# Altium PCB ESP-01S-WS-V1.0.PcbDoc
Units mil, origin at the board's own origin, x right, y up, seen from the top; angles counter-clockwise.
Board outline 1446.9 x 1662.9 mil, 2 copper layers (Top Layer, Bottom Layer); 12 components, 9 nets, 32 pads, 0 vias.
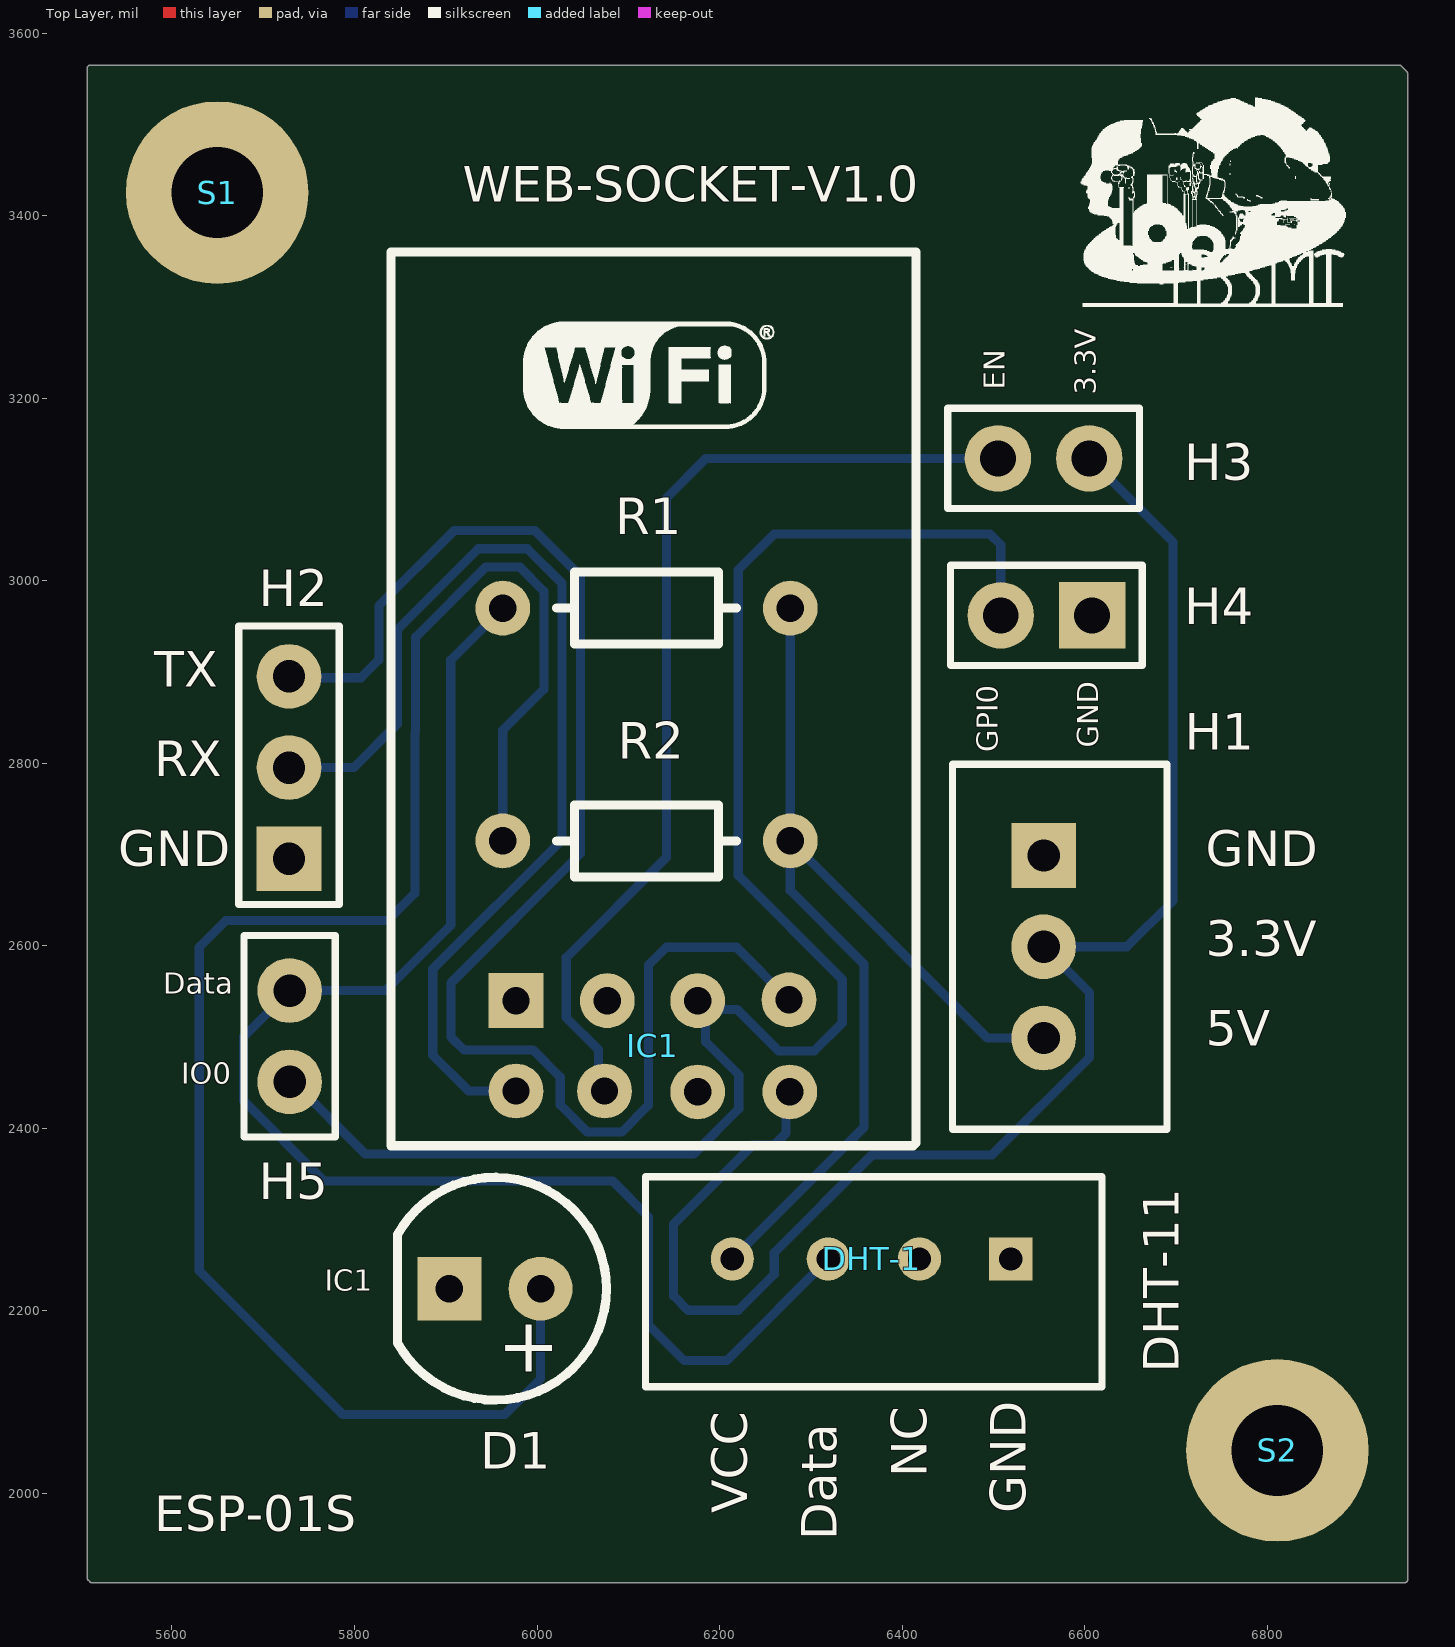
[diagram p0: Top Layer view]
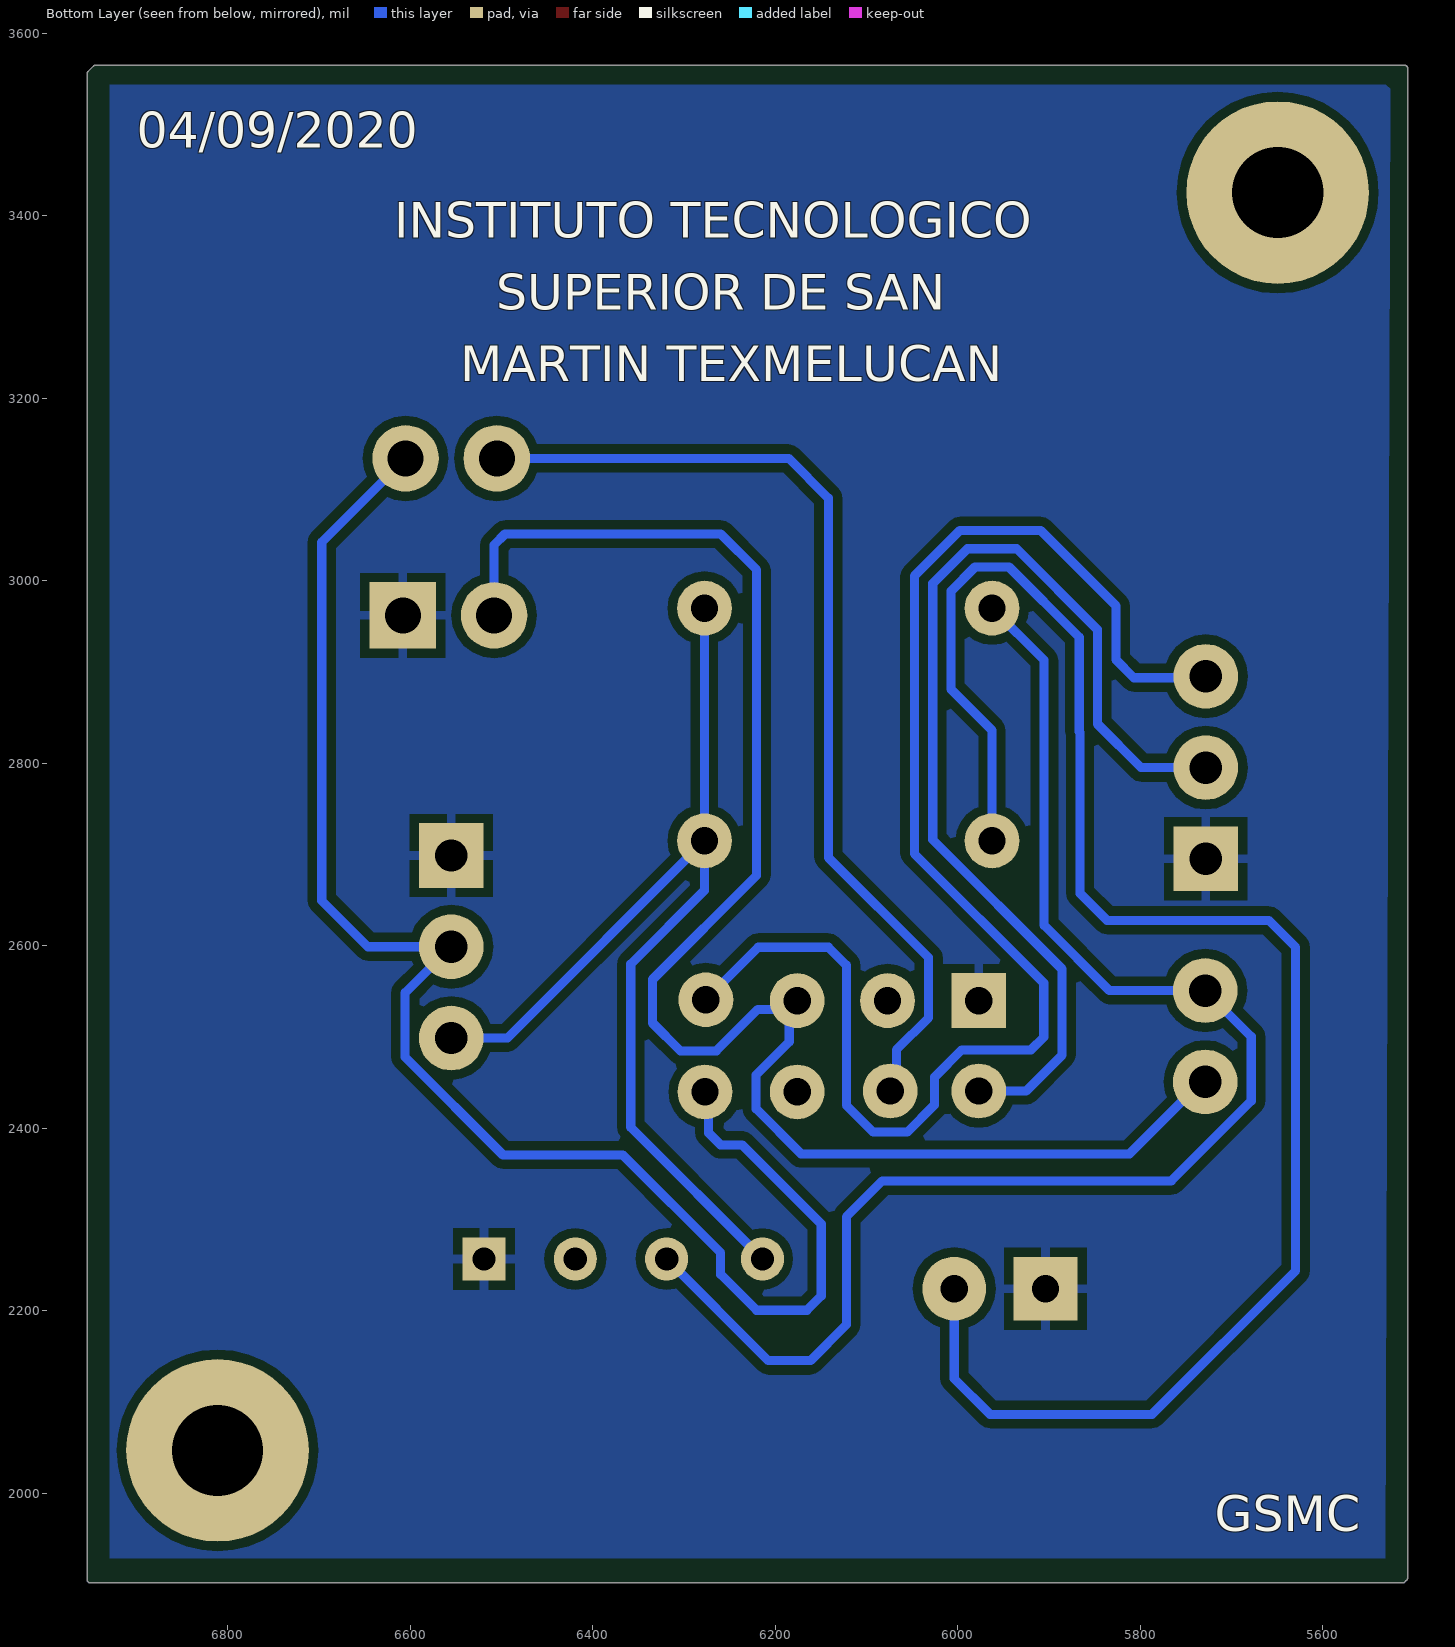
[diagram p1: Bottom Layer view, seen from below]
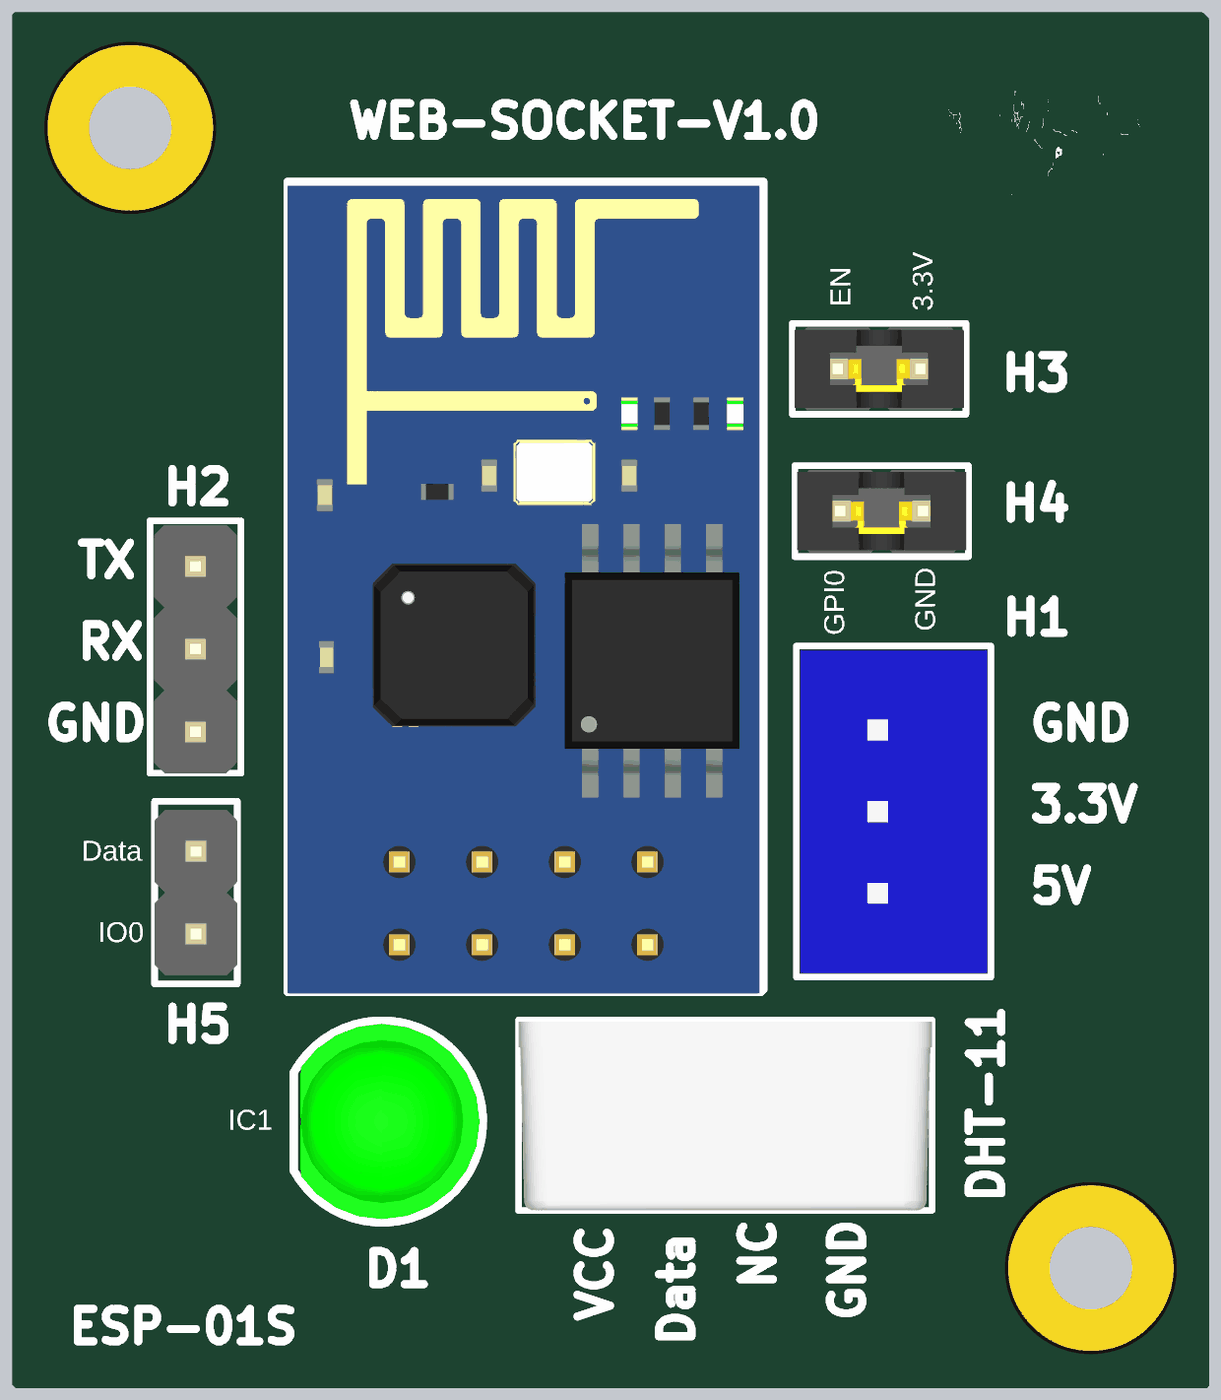
[diagram p2: 3D render of the assembled board from above, using the file's embedded part models]

## Layer stack, top to bottom
Top Solder: solder mask 0.4, Solder Resist, Dk 3.5
Top Layer: signal copper 1.4
Dielectric 1: dielectric 12.6, FR-4, Dk 4.8
Bottom Layer: signal copper 1.4
Bottom Solder: solder mask 0.4, Solder Resist, Dk 3.5

## Board outline
5507.05,1908 ccw(c5511,1908) 5509.39,1904.39 ccw(c5513,1906) 5513,1902.05 6950,1902.05 ccw(c6950,1906) 6953.95,1906 6953.95,3555 ccw(c6950,3555) 6952.79,3557.79 6946.79,3563.79 ccw(c6944,3561) 6944,3564.95 5511,3564.95 ccw(c5511,3561) 5507.05,3561

## Design rules (kind name [scope] priority, off if disabled: settings)
Clearance [All] p1: gap=10 ignorepadtopadclearanceinfootprint=FALSE except(0: Arc-Hole Track-Hole SMDPad-Hole THPad-Hole Via-Hole Fill-Hole Poly-Hole Region-Hole Text-Hole)
PolygonConnect [All] p1: connectstyle=Relief reliefconductorwidth=10 reliefentries=4 polygonreliefangle="90 Angle" airgapwidth=10
RoutingVias [All] p1: holewidth=28 width=50 viastyle="Through Hole" minholewidth=28 minwidth=50 maxholewidth=28 maxwidth=50
SolderMaskExpansion [All] p1: expansion=4 istentingtop=FALSE
Width [All] p1: maxlimit=10 minlimit=10 preferedwidth=10
30 further rules are at their usual default settings.

## Components (designator, comment, footprint, x,y, rotation, side; value= is the part's Value field where it differs from the comment)
D1 "Led_green" Diode_5mm_green 5953.94,2224.41 r180 top
DHT-1 "DHT-11" DHT-11 6214,2257 r0 top
H1 "JST PH" JST-PH-VCC 6555,2699 r270 top
H2 "JST PH" HEADER_PIN_1X3_SERIAL 5728.35,2695.28 r90 top
H3 "EN-VCC" Header_Pin_1X2-EN 6505,3134 r0 top
H4 "GPI0" Header_Pin_1X2-GPI0 6508,2962 r0 top
H5 "Header_Pin_1X2_Data" Header_Pin_1X2_Data 5729,2451 r90 top
IC1 "ESP8266 ESP-01" "ESP8266 ESP-01" 5840,2380 r0 top
R1 "330R" 330R_P8mm_0.25W 6120,2970 r180 top
R2 "330R" 330R_P8mm_0.25W 6120,2715 r180 top
S1 "Sujecion" SUJECION 5649.61,3425.2 r0 top
S2 "Sujecion" SUJECION 6811.02,2047.24 r0 top

## Footprints (in the part's own frame and the unit in brackets; to place one, negate y for a bottom-side part, rotate by r counter-clockwise, add the part's x,y. Pads: shape width x height; smd on the part's side, far side on the other; paste and mask are expansions set on the pad)
330R_P8mm_0.25W [mil]
  round 60 hole 30: 1(-157.48,0) 2(157.48,0)
  silkscreen extent -98,-39 98,39, body extent -167,-50 167,50, height 104
DHT-11 [mm]
  round 1.2 hole 0.65: Data(2.667,0) NC(5.207,0) VCC(0,0)
  rect 1.2x1.2 hole 0.65: GND(7.747,0)
  silkscreen extent -2.41,-3.56 10.29,2.29, body extent -2.41,-3.56 10.29,2.24, height 16.48
Diode_5mm_green [mil]
  rect 70x70 hole 30: 1(50,0)
  round 70 hole 30: 2(-50,0)
  silkscreen extent -122,-122 107,122, body extent -118,-118 98,118, height 361
"ESP8266 ESP-01" [mil] "ESP8266 ESP-01"
  round 60 hole 30: 3.3V(437,60) EN(234,61) IO0(336,160) IO2(237,160) RST(336,60) RX(436,161) TX(137,61)
  rect 60x60 hole 30: GND(137,160)
  silkscreen extent 0,1 575,980, body extent 0,-1 570,975, height 128
Header_Pin_1X2-EN [mm]
  round 1.85 hole 1: 3.3V(2.54,0) EN(0,0)
  silkscreen extent -1.4,-1.4 3.94,1.4, body extent -1.33,-1.27 3.87,1.27, height 8.5
Header_Pin_1X2-GPI0 [mm]
  rect 1.85x1.85 hole 1: GND(2.54,0)
  round 1.85 hole 1: GPI0(0,0)
  silkscreen extent -1.4,-1.4 3.94,1.4, body extent -1.33,-1.27 3.87,1.27, height 8.5
Header_Pin_1X2_Data [mm]
  round 1.8 hole 0.9: Data(2.54,0) IO0(0,0)
  silkscreen extent -1.53,-1.27 4.07,1.27, body extent -1.27,-1.27 3.81,1.27, height 8.51
HEADER_PIN_1X3_SERIAL [mm]
  rect 1.8x1.8 hole 0.9: GND(0,0)
  round 1.8 hole 0.9: RX(2.54,0) TX(5.08,0)
  silkscreen extent -1.27,-1.4 6.48,1.4, body extent -1.27,-1.27 6.35,1.27, height 8.38
JST-PH-VCC [mm]
  round 1.8 hole 0.9: 3.3V(2.54,0) 5V(5.08,0)
  rect 1.8x1.8 hole 0.9: GND(0,0)
  silkscreen extent -2.54,-2.54 7.62,3.43, body extent -2.41,-2.41 7.49,3.34, height 7
SUJECION [mil]
  round 200 hole 100: S(0,0)

## Part data
H1: library part Header_Pin_1X3_VCC
H2: library part Header_Pin_1X3_SERIAL
H3: library part Header_Pin_1X2_EN
H4: library part Header_Pin_1X2_GPI0
R1 R2: library part 330R_0.25W
S1 S2: library part SUJECION

## Nets (pads, with @x,y where several pads share a name; then routed paths per layer and width w, separated by ;. In a path a pad name is that pad's centre, name@x,y a point inside that pad or via, vN(x,y) a via of type N, cw(c..) or ccw(c..) an arc to the next point about the centre after c; other vN are vias at no path point)
GND: D1.1 DHT-1.GND H1.GND H2.GND H4.GND IC1.GND
NetD1_2: D1.2 R2.2 | length 1925.5
  Bottom Layer w10: R2.2 5962.52,2836.08 6007.52,2881.08 6007.52,2988.64 5981.16,3015 5943.88,3015 5867,2938.12 5867,2834.78 5866.14,2833.92 5866.14,2657.48 5836.61,2627.95 5659.45,2627.95 5629.92,2598.43 5629.92,2244.09 5787.4,2086.61 5964.57,2086.61 6003.94,2125.98 D1.2
NetDHT-1_Data: DHT-1.Data H5.Data R1.2 | length 1592.5
  Bottom Layer w10: R1.2 5905.51,2912.99 5905.51,2622.64 5833.88,2551 H5.Data 5678.57,2500.57 5678.57,2430.11 5766.16,2342.52 6082.68,2342.52 6122.05,2303.15 6122.05,2185.04 6161.42,2145.67 6207.67,2145.67 DHT-1.Data
NetDHT-1_VCC: DHT-1.VCC H1.5V R1.1 R2.1 | length 1173.2
  Bottom Layer w10: DHT-1.VCC 6358.27,2401.27 6358.27,2580.03 6277.48,2660.81 R2.1 ; R1.1 R2.1 ; H1.5V 6493.48,2499 R2.1
NetH1_3.3V: H1.3.3V H3.3.3V IC1.3.3V | length 1708.2
  Bottom Layer w10: IC1.3.3V 6272.95,2435.95 6272.95,2395 6259.84,2381.89 6236.22,2381.89 6149.61,2295.28 6149.61,2216.54 6165.35,2200.79 6220.47,2200.79 6259.84,2240.16 6259.84,2263.78 6367.01,2370.94 6498.27,2370.94 6605.43,2478.11 6605.43,2548.57 H1.3.3V 6646.24,2599 6696.85,2649.61 6696.85,3042.15 H3.3.3V
NetH2_RX: H2.RX IC1.TX | length 1157.7
  Bottom Layer w10: H2.RX@5728,2807 H2.RX@5728.09,2807.09 ; H2.RX 5799.21,2795.28 5847,2843.06 5847,2946.4 5935.6,3035 5989.44,3035 6027.52,2996.92 6027.52,2716.36 5885.83,2574.67 5885.83,2480.32 5925.14,2441 IC1.TX
NetH2_TX: H2.TX IC1.RX | length 1634.2
  Bottom Layer w10: H2.TX 5729.92,2893.7 5807.09,2893.7 5826.77,2913.39 5826.77,2972.44 5909.33,3055 5997.73,3055 6047.52,3005.21 6047.52,2701.06 5905.83,2559.37 5905.83,2500 5919.83,2486 5995.64,2486 6025.5,2456.14 6025.5,2425.86 6055.36,2396 6092.64,2396 6122.05,2425.41 6122.05,2578.74 6141.73,2598.43 6218.57,2598.43 IC1.RX
NetH3_EN: H3.EN IC1.EN | length 1109.2
  Bottom Layer w10: IC1.EN 6067.36,2447.64 6067.36,2486 6032,2521.36 6032,2587.12 6141.73,2696.85 6141.73,3090.55 6185.18,3134 H3.EN 6500.92,3129.92 6496.06,3129.92 H3.EN@6496.06,3125.06
NetH4_GPI0: H4.GPI0 H5.IO0 IC1.IO0 | length 1806.6
  Bottom Layer w10: H5.IO0 5733,2451 5812,2372 6171.64,2372 6221,2421.36 6221,2458.64 6184.64,2495 IC1.IO0@6184.64,2531.36 ; IC1.IO0@6176,2527 IC1.IO0 IC1.IO0@6184.64,2531.36 ; H4.GPI0 6508,3039.24 6496.06,3051.18 6259.84,3051.18 6220.47,3011.81 6220.47,2677.17 6334.44,2563.2 6334.44,2515.54 6303.9,2485 6264.53,2485 6219.1,2530.43 6185.57,2530.43 IC1.IO0@6184.64,2531.36
pads on no net: DHT-1.NC IC1.IO2 IC1.RST S1.S S2.S

## Polygon pours and split planes (outlines as drawn)
GND on Bottom Layer "GND_L02_P008" (solid, pour order 8): 5526,3545 5527.69,3543.31 6929.13,3543.31 6929.13,1929.13 5531.5,1929.13
no net on Bottom Layer "NONET_L02_P000" (solid, pour order 0): 5526,3545

## Silkscreen, mask and mechanical layers (free items; w line width, h text height)
Top Overlay:
  drawing of 47 lines, arcs and shapes, not listed
  text "WEB-SOCKET-V1.0" at 5918.73,3415.21 h39.37
  text "DHT-11" at 6702.9,2132.58 h39.37 r90
  text "ESP-01S" at 5580.75,1958.52 h39.37
Bottom Overlay:
  text "04/09/2020" at 6899.45,3474.57 h39.37
  text "INSTITUTO TECNOLOGICO" at 6617.33,3375.84 h39.37
  text "SUPERIOR DE SAN" at 6505.81,3297.1 h39.37
  text "MARTIN TEXMELUCAN" at 6545.17,3218.36 h39.37
  text "GSMC" at 5718.35,1958.82 h39.37
Mechanical 1:
  lines w7.87: 5511,1908 5513,1906 6950,1906 6950,3555 6944,3561 6924,3561 5511,3561 5511,1908

## Text inside footprints (layer, text, board x,y; h text height)
D1: Top Overlay "+" at 6025.43,2185.04 h60 r180
DHT-1: Top Overlay "VCC" at 6230.16,1978.5 h39.37 r90; Top Overlay "Data" at 6328.58,1948.98 h39.37 r90; Top Overlay "NC" at 6427.01,2017.87 h39.37 r90; Top Overlay "GND" at 6535.28,1978.5 h39.37 r90
H1: Top Overlay "3.3V" at 6732.44,2588.74 h39.37; Top Overlay "5V" at 6732.44,2490.32 h39.37; Top Overlay "GND" at 6732.44,2687.17 h39.37
H2: Top Overlay "GND" at 5541.5,2687.17 h39.37; Top Overlay "TX" at 5580.87,2884.02 h39.37; Top Overlay "RX" at 5580.87,2785.59 h39.37
H3: Top Overlay "EN" at 6520,3209 h39.37 r90; Top Overlay "3.3V" at 6619.58,3204 h39.37 r90
H4: Top Overlay "GND" at 6622.58,2817 h39.37 r90
H5: Top Overlay "IO0" at 5610.24,2441.37 h39.37; Top Overlay "Data" at 5590.55,2539.79 h39.37
IC1: Mechanical 13 "CUTOUT POLYGON" at 5850.04,3318.59 h10; Mechanical 13 "ANTENNA AREA" at 5850.04,3338.59 h10